# EAGLE board 13809-AT42QT1010_Capacitive_Touch_Breakout-Panel.v20 (EAGLE 7.7.0), part 1 of 3
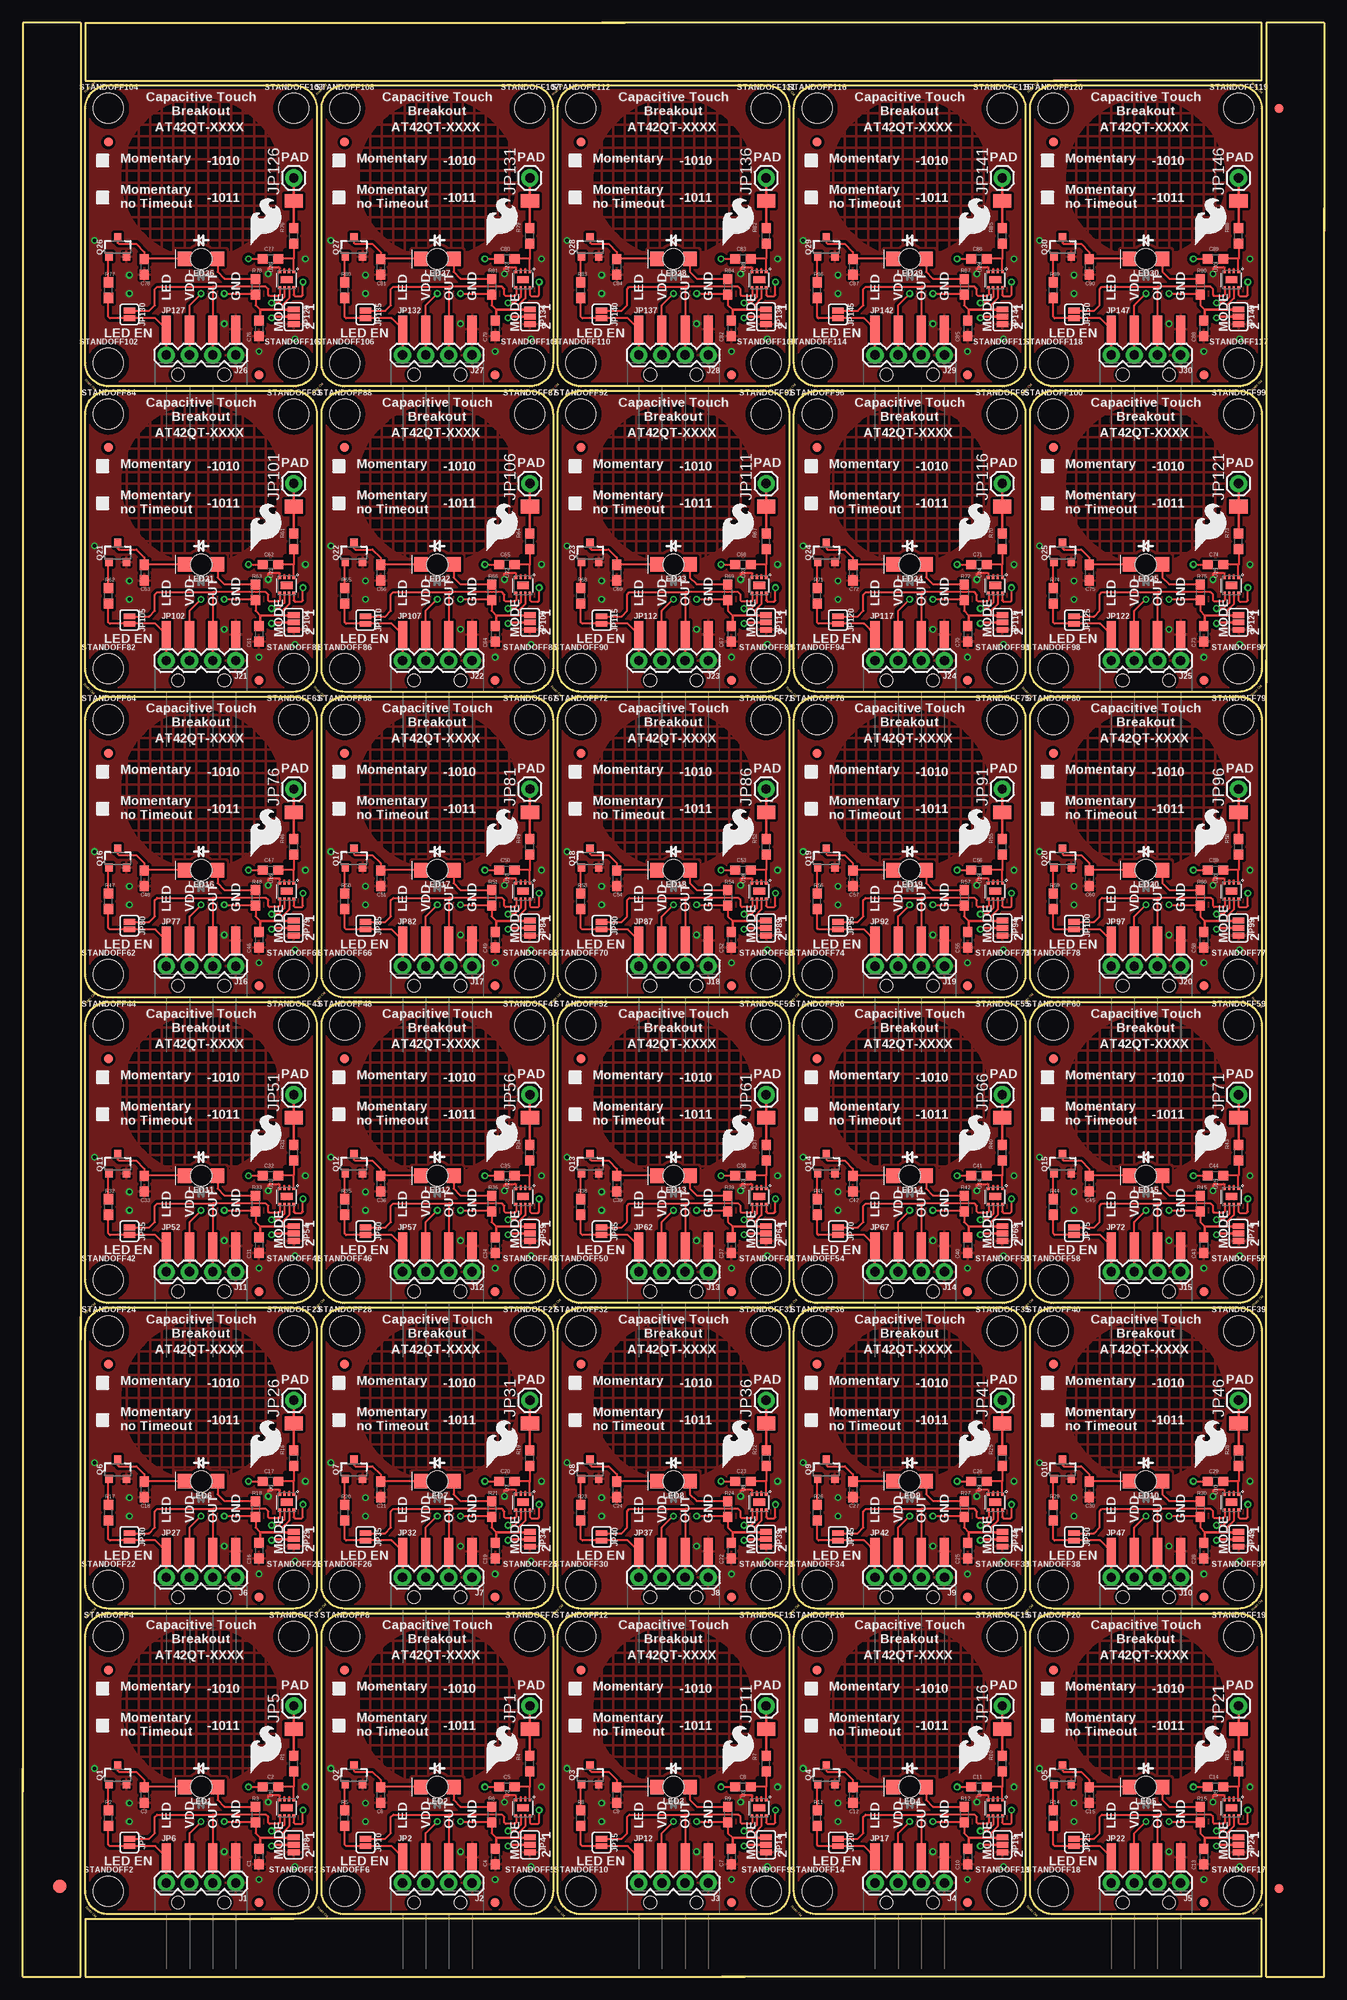
[diagram p0: board, top side]
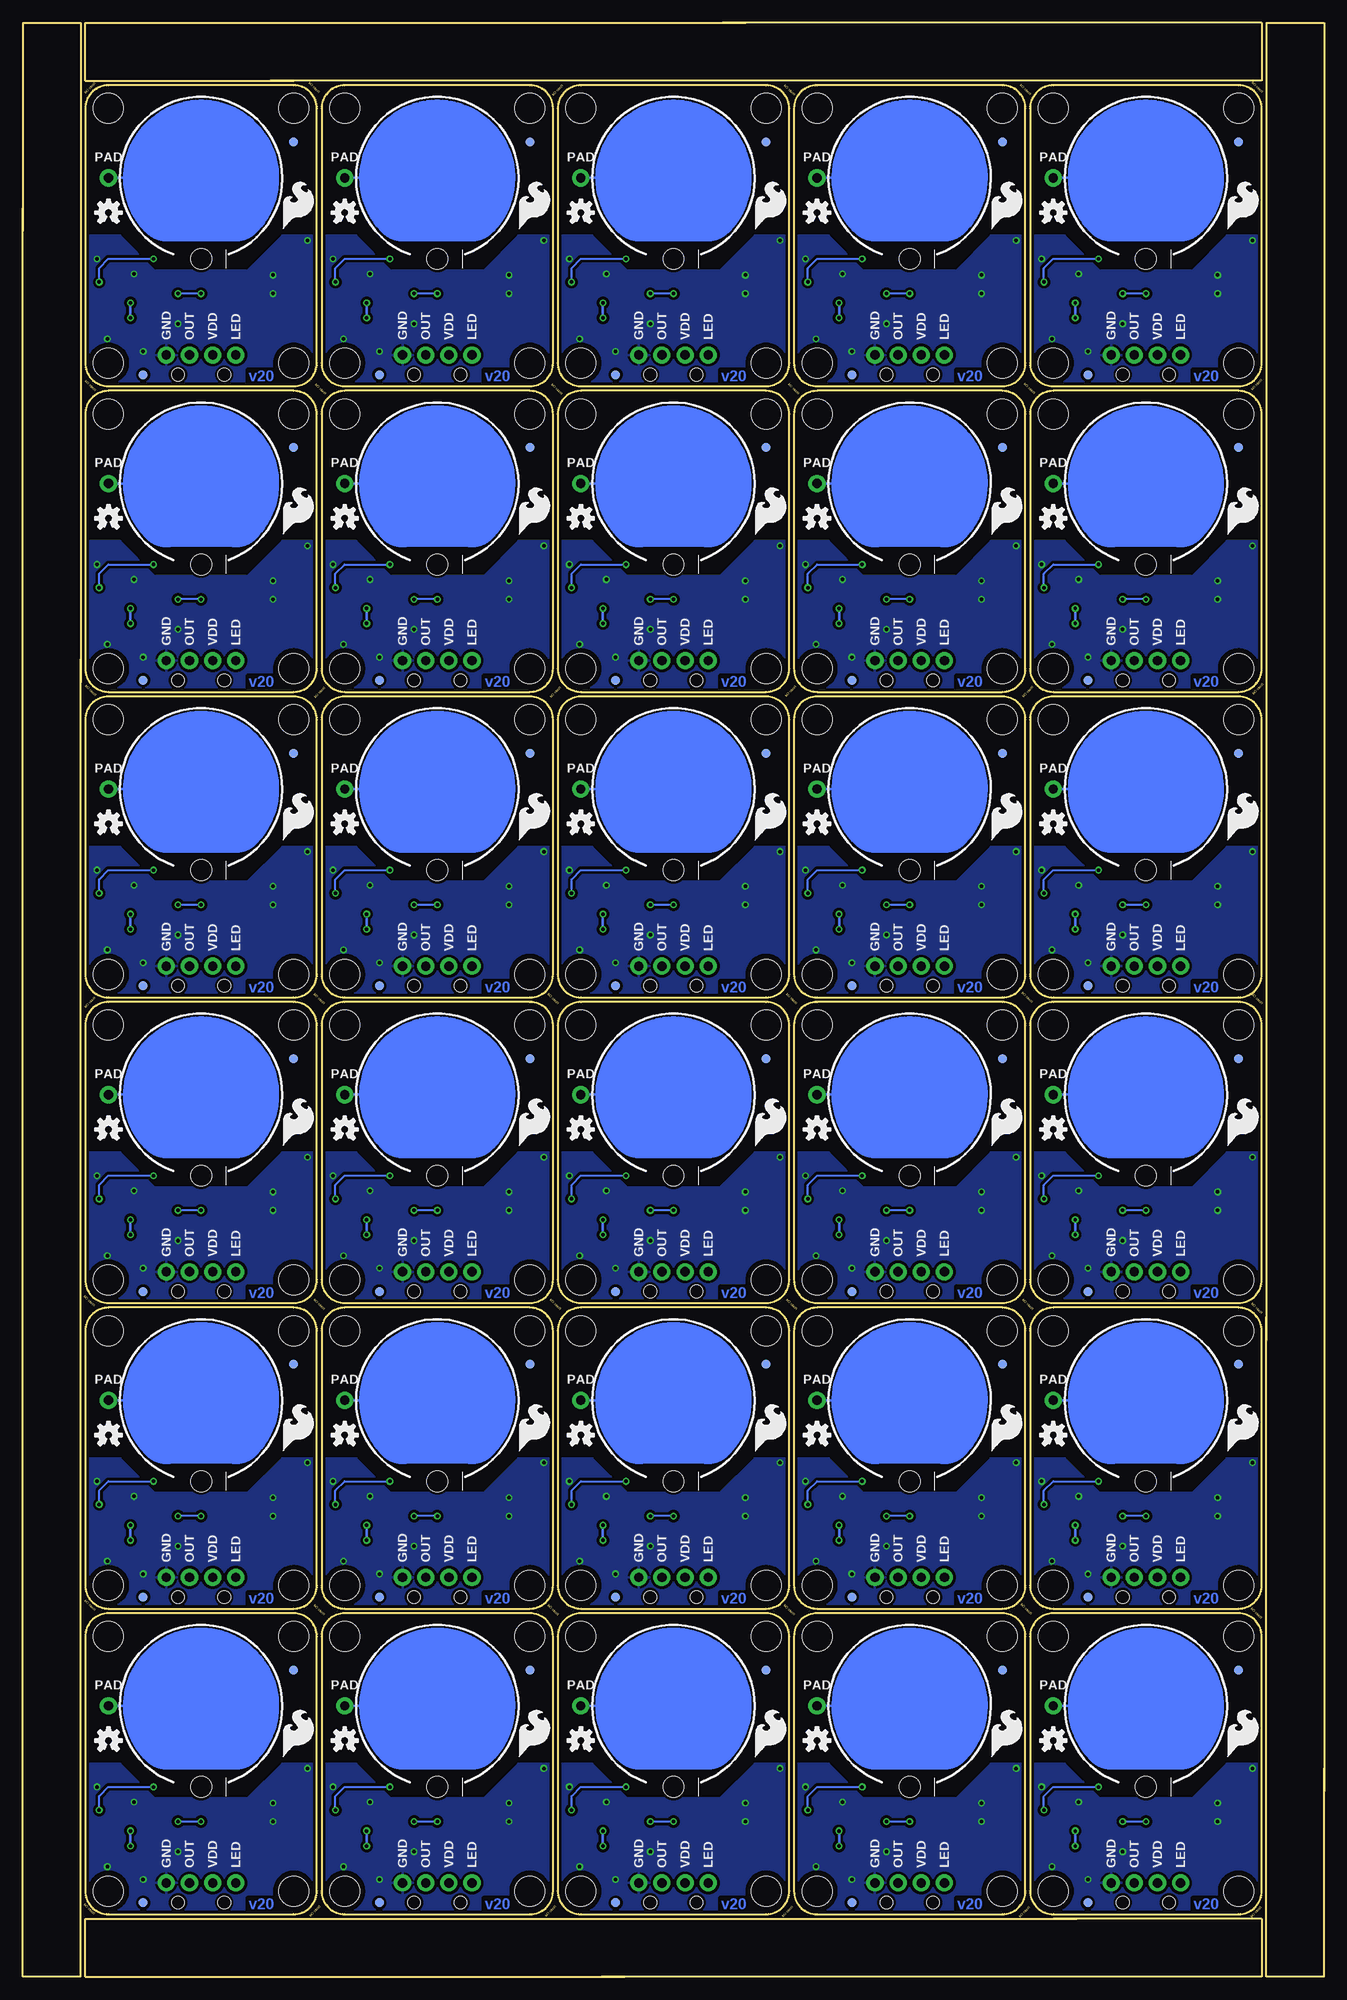
[diagram p1: board, bottom side, seen from below]

Size 142.75 x 214.38 mm. Coordinates in mm from the lower left corner, seen from the top.
Outline: 264 segments
Copper layers (1*16): Top 0.035mm / dielectric 1.5mm / Bottom 0.035mm
Design rules "SparkFun-2-layer-TIGHT": minimum track width 7mil, minimum drill 15mil, track to track 7mil, track to pad 7mil, pad to pad 7mil, via to via 7mil, smd to smd 7mil, copper to edge 7mil, drill to drill 7mil, minimum pad ring 7mil, minimum via ring 7mil, stop-mask expansion 4mil, vias tented up to drill 25mil, thermal gap 10mil
Net classes: 0 default: clearance 0.205 mm
tRestrict: area 6.9,6.9 to 9.4,9.4; area 29.7,6.9 to 32.3,9.4; area 6.9,37.3 to 9.4,39.9; area 29.7,37.3 to 32.3,39.9; area 21.8,9.1 to 22.4,9.7; area 16.8,9.1 to 17.3,9.7; area 18,7.4 to 21.1,8.9; area 19.3,9.1 to 19.8,9.7; area 26.3,15.9 to 26.7,16.4; area 29,19.9 to 29.3,20.4; area 28.8,21.2 to 29.2,21.7; area 32.8,6.9 to 35.3,9.4; 318 more areas

## Footprints (pad centres in the part's own frame; a part is rotated, then mirrored left to right if it is on the bottom)
0603 = smd 1.1 x 1: 1 -0.85,0; 2 0.85,0
FIDUCIAL-1.5X3 = smd 1.5 x 1.5: 1 0,0
FIDUCIAL-1X2 = smd 1 x 1: 1 0,0
1X04 = drill 1.016 pad 1.88: 1 0,0; 2 2.54,0; 3 5.08,0; 4 7.62,0
1X01 = drill 1.016 pad 1.88: 1 0,0
1X04_SMD_RA_MALE = smd 1 x 3: 1 -3.81,5; 2 -1.27,5; 3 1.27,5; 4 3.81,5 | hole 1.4: -2.54,0; 2.54,0
PAD-1.5X4.5 = smd 1.5 x 2: P$1 0,0
SMT-JUMPER_3_NO_SILK = smd 0.635 x 1.27: 1 -0.813,0; 2 0,0; 3 0.813,0
SMT-JUMPER_2_NO_SILK = smd 0.635 x 1.27: 1 -0.406,0; 2 0.406,0
LED-1206-BOTTOM = smd 1.5 x 1.6: A -1.8,0; C 1.8,0 | hole 2.3: 0,0
SOT23-3 = smd 0.8 x 0.9: 1 -0.95,-1; 2 0.95,-1; 3 0,1.1
STAND-OFF = hole 3.302: 0,0
UDFN/USON_8_PAD = smd 0.25 x 0.3: 1 -0.75,-0.852; 2 -0.25,-0.852; 3 0.25,-0.852; 4 0.75,-0.852; 5 0.75,0.852; 6 0.25,0.852; 7 -0.25,0.852; 8 -0.75,0.852 | smd 1.3 x 0.8: P$1 0,0

## Placement (x,y rotation side)
C1  0.1uF  [0603]  25.91,13.21 270 top
C2  10nF  [0603]  27.18,20.83 180 top
C3  10nF  [0603]  13.34,19.94 270 top
C4  0.1uF  [0603]  51.82,13.21 270 top
C5  10nF  [0603]  53.09,20.83 180 top
C6  10nF  [0603]  39.24,19.94 270 top
C7  0.1uF  [0603]  77.72,13.21 270 top
C8  10nF  [0603]  78.99,20.83 180 top
C9  10nF  [0603]  65.15,19.94 270 top
C10  0.1uF  [0603]  103.63,13.21 270 top
C11  10nF  [0603]  104.9,20.83 180 top
C12  10nF  [0603]  91.06,19.94 270 top
C13  0.1uF  [0603]  129.54,13.21 270 top
C14  10nF  [0603]  130.81,20.83 180 top
C15  10nF  [0603]  116.97,19.94 270 top
C16  0.1uF  [0603]  25.91,46.74 270 top
C17  10nF  [0603]  27.18,54.36 180 top
C18  10nF  [0603]  13.34,53.47 270 top
C19  0.1uF  [0603]  51.82,46.74 270 top
C20  10nF  [0603]  53.09,54.36 180 top
C21  10nF  [0603]  39.24,53.47 270 top
C22  0.1uF  [0603]  77.72,46.74 270 top
C23  10nF  [0603]  78.99,54.36 180 top
C24  10nF  [0603]  65.15,53.47 270 top
C25  0.1uF  [0603]  103.63,46.74 270 top
C26  10nF  [0603]  104.9,54.36 180 top
C27  10nF  [0603]  91.06,53.47 270 top
C28  0.1uF  [0603]  129.54,46.74 270 top
C29  10nF  [0603]  130.81,54.36 180 top
C30  10nF  [0603]  116.97,53.47 270 top
C31  0.1uF  [0603]  25.91,80.26 270 top
C32  10nF  [0603]  27.18,87.88 180 top
C33  10nF  [0603]  13.34,87 270 top
C34  0.1uF  [0603]  51.82,80.26 270 top
C35  10nF  [0603]  53.09,87.88 180 top
C36  10nF  [0603]  39.24,87 270 top
C37  0.1uF  [0603]  77.72,80.26 270 top
C38  10nF  [0603]  78.99,87.88 180 top
C39  10nF  [0603]  65.15,87 270 top
C40  0.1uF  [0603]  103.63,80.26 270 top
C41  10nF  [0603]  104.9,87.88 180 top
C42  10nF  [0603]  91.06,87 270 top
C43  0.1uF  [0603]  129.54,80.26 270 top
C44  10nF  [0603]  130.81,87.88 180 top
C45  10nF  [0603]  116.97,87 270 top
C46  0.1uF  [0603]  25.91,113.79 270 top
C47  10nF  [0603]  27.18,121.41 180 top
C48  10nF  [0603]  13.34,120.52 270 top
C49  0.1uF  [0603]  51.82,113.79 270 top
C50  10nF  [0603]  53.09,121.41 180 top
C51  10nF  [0603]  39.24,120.52 270 top
C52  0.1uF  [0603]  77.72,113.79 270 top
C53  10nF  [0603]  78.99,121.41 180 top
C54  10nF  [0603]  65.15,120.52 270 top
C55  0.1uF  [0603]  103.63,113.79 270 top
C56  10nF  [0603]  104.9,121.41 180 top
C57  10nF  [0603]  91.06,120.52 270 top
C58  0.1uF  [0603]  129.54,113.79 270 top
C59  10nF  [0603]  130.81,121.41 180 top
C60  10nF  [0603]  116.97,120.52 270 top
C61  0.1uF  [0603]  25.91,147.32 270 top
C62  10nF  [0603]  27.18,154.94 180 top
C63  10nF  [0603]  13.34,154.05 270 top
C64  0.1uF  [0603]  51.82,147.32 270 top
C65  10nF  [0603]  53.09,154.94 180 top
C66  10nF  [0603]  39.24,154.05 270 top
C67  0.1uF  [0603]  77.72,147.32 270 top
C68  10nF  [0603]  78.99,154.94 180 top
C69  10nF  [0603]  65.15,154.05 270 top
C70  0.1uF  [0603]  103.63,147.32 270 top
C71  10nF  [0603]  104.9,154.94 180 top
C72  10nF  [0603]  91.06,154.05 270 top
C73  0.1uF  [0603]  129.54,147.32 270 top
C74  10nF  [0603]  130.81,154.94 180 top
C75  10nF  [0603]  116.97,154.05 270 top
C76  0.1uF  [0603]  25.91,180.85 270 top
C77  10nF  [0603]  27.18,188.47 180 top
C78  10nF  [0603]  13.34,187.58 270 top
C79  0.1uF  [0603]  51.82,180.85 270 top
C80  10nF  [0603]  53.09,188.47 180 top
C81  10nF  [0603]  39.24,187.58 270 top
C82  0.1uF  [0603]  77.72,180.85 270 top
C83  10nF  [0603]  78.99,188.47 180 top
C84  10nF  [0603]  65.15,187.58 270 top
C85  0.1uF  [0603]  103.63,180.85 270 top
C86  10nF  [0603]  104.9,188.47 180 top
C87  10nF  [0603]  91.06,187.58 270 top
C88  0.1uF  [0603]  129.54,180.85 270 top
C89  10nF  [0603]  130.81,188.47 180 top
C90  10nF  [0603]  116.97,187.58 270 top
E$1  [FIDUCIAL-1.5X3]  4.06,9.91 0 top
E$7  [FIDUCIAL-1X2]  137.79,204.98 180 top
E$8  [FIDUCIAL-1X2]  137.79,9.65 0 top
FID1  FIDUCIAL1X2  [FIDUCIAL-1X2]  9.4,33.66 0 top
FID2  FIDUCIAL1X2  [FIDUCIAL-1X2]  25.91,8.13 0 top
FID3  FIDUCIAL1X2  [FIDUCIAL-1X2]  25.91,8.13 0 bottom
FID4  FIDUCIAL1X2  [FIDUCIAL-1X2]  9.4,33.66 0 bottom
FID5  FIDUCIAL1X2  [FIDUCIAL-1X2]  35.31,33.66 0 top
FID6  FIDUCIAL1X2  [FIDUCIAL-1X2]  51.82,8.13 0 top
FID7  FIDUCIAL1X2  [FIDUCIAL-1X2]  51.82,8.13 0 bottom
FID8  FIDUCIAL1X2  [FIDUCIAL-1X2]  35.31,33.66 0 bottom
FID9  FIDUCIAL1X2  [FIDUCIAL-1X2]  61.21,33.66 0 top
FID10  FIDUCIAL1X2  [FIDUCIAL-1X2]  77.72,8.13 0 top
FID11  FIDUCIAL1X2  [FIDUCIAL-1X2]  77.72,8.13 0 bottom
FID12  FIDUCIAL1X2  [FIDUCIAL-1X2]  61.21,33.66 0 bottom
FID13  FIDUCIAL1X2  [FIDUCIAL-1X2]  87.12,33.66 0 top
FID14  FIDUCIAL1X2  [FIDUCIAL-1X2]  103.63,8.13 0 top
FID15  FIDUCIAL1X2  [FIDUCIAL-1X2]  103.63,8.13 0 bottom
FID16  FIDUCIAL1X2  [FIDUCIAL-1X2]  87.12,33.66 0 bottom
FID17  FIDUCIAL1X2  [FIDUCIAL-1X2]  113.03,33.66 0 top
FID18  FIDUCIAL1X2  [FIDUCIAL-1X2]  129.54,8.13 0 top
FID19  FIDUCIAL1X2  [FIDUCIAL-1X2]  129.54,8.13 0 bottom
FID20  FIDUCIAL1X2  [FIDUCIAL-1X2]  113.03,33.66 0 bottom
FID21  FIDUCIAL1X2  [FIDUCIAL-1X2]  9.4,67.18 0 top
FID22  FIDUCIAL1X2  [FIDUCIAL-1X2]  25.91,41.66 0 top
FID23  FIDUCIAL1X2  [FIDUCIAL-1X2]  25.91,41.66 0 bottom
FID24  FIDUCIAL1X2  [FIDUCIAL-1X2]  9.4,67.18 0 bottom
FID25  FIDUCIAL1X2  [FIDUCIAL-1X2]  35.31,67.18 0 top
FID26  FIDUCIAL1X2  [FIDUCIAL-1X2]  51.82,41.66 0 top
FID27  FIDUCIAL1X2  [FIDUCIAL-1X2]  51.82,41.66 0 bottom
FID28  FIDUCIAL1X2  [FIDUCIAL-1X2]  35.31,67.18 0 bottom
FID29  FIDUCIAL1X2  [FIDUCIAL-1X2]  61.21,67.18 0 top
FID30  FIDUCIAL1X2  [FIDUCIAL-1X2]  77.72,41.66 0 top
FID31  FIDUCIAL1X2  [FIDUCIAL-1X2]  77.72,41.66 0 bottom
FID32  FIDUCIAL1X2  [FIDUCIAL-1X2]  61.21,67.18 0 bottom
FID33  FIDUCIAL1X2  [FIDUCIAL-1X2]  87.12,67.18 0 top
FID34  FIDUCIAL1X2  [FIDUCIAL-1X2]  103.63,41.66 0 top
FID35  FIDUCIAL1X2  [FIDUCIAL-1X2]  103.63,41.66 0 bottom
FID36  FIDUCIAL1X2  [FIDUCIAL-1X2]  87.12,67.18 0 bottom
FID37  FIDUCIAL1X2  [FIDUCIAL-1X2]  113.03,67.18 0 top
FID38  FIDUCIAL1X2  [FIDUCIAL-1X2]  129.54,41.66 0 top
FID39  FIDUCIAL1X2  [FIDUCIAL-1X2]  129.54,41.66 0 bottom
FID40  FIDUCIAL1X2  [FIDUCIAL-1X2]  113.03,67.18 0 bottom
FID41  FIDUCIAL1X2  [FIDUCIAL-1X2]  9.4,100.71 0 top
FID42  FIDUCIAL1X2  [FIDUCIAL-1X2]  25.91,75.18 0 top
FID43  FIDUCIAL1X2  [FIDUCIAL-1X2]  25.91,75.18 0 bottom
FID44  FIDUCIAL1X2  [FIDUCIAL-1X2]  9.4,100.71 0 bottom
FID45  FIDUCIAL1X2  [FIDUCIAL-1X2]  35.31,100.71 0 top
FID46  FIDUCIAL1X2  [FIDUCIAL-1X2]  51.82,75.18 0 top
FID47  FIDUCIAL1X2  [FIDUCIAL-1X2]  51.82,75.18 0 bottom
FID48  FIDUCIAL1X2  [FIDUCIAL-1X2]  35.31,100.71 0 bottom
FID49  FIDUCIAL1X2  [FIDUCIAL-1X2]  61.21,100.71 0 top
FID50  FIDUCIAL1X2  [FIDUCIAL-1X2]  77.72,75.18 0 top
FID51  FIDUCIAL1X2  [FIDUCIAL-1X2]  77.72,75.18 0 bottom
FID52  FIDUCIAL1X2  [FIDUCIAL-1X2]  61.21,100.71 0 bottom
FID53  FIDUCIAL1X2  [FIDUCIAL-1X2]  87.12,100.71 0 top
FID54  FIDUCIAL1X2  [FIDUCIAL-1X2]  103.63,75.18 0 top
FID55  FIDUCIAL1X2  [FIDUCIAL-1X2]  103.63,75.18 0 bottom
FID56  FIDUCIAL1X2  [FIDUCIAL-1X2]  87.12,100.71 0 bottom
FID57  FIDUCIAL1X2  [FIDUCIAL-1X2]  113.03,100.71 0 top
FID58  FIDUCIAL1X2  [FIDUCIAL-1X2]  129.54,75.18 0 top
FID59  FIDUCIAL1X2  [FIDUCIAL-1X2]  129.54,75.18 0 bottom
FID60  FIDUCIAL1X2  [FIDUCIAL-1X2]  113.03,100.71 0 bottom
FID61  FIDUCIAL1X2  [FIDUCIAL-1X2]  9.4,134.24 0 top
FID62  FIDUCIAL1X2  [FIDUCIAL-1X2]  25.91,108.71 0 top
FID63  FIDUCIAL1X2  [FIDUCIAL-1X2]  25.91,108.71 0 bottom
FID64  FIDUCIAL1X2  [FIDUCIAL-1X2]  9.4,134.24 0 bottom
FID65  FIDUCIAL1X2  [FIDUCIAL-1X2]  35.31,134.24 0 top
FID66  FIDUCIAL1X2  [FIDUCIAL-1X2]  51.82,108.71 0 top
FID67  FIDUCIAL1X2  [FIDUCIAL-1X2]  51.82,108.71 0 bottom
FID68  FIDUCIAL1X2  [FIDUCIAL-1X2]  35.31,134.24 0 bottom
FID69  FIDUCIAL1X2  [FIDUCIAL-1X2]  61.21,134.24 0 top
FID70  FIDUCIAL1X2  [FIDUCIAL-1X2]  77.72,108.71 0 top
FID71  FIDUCIAL1X2  [FIDUCIAL-1X2]  77.72,108.71 0 bottom
FID72  FIDUCIAL1X2  [FIDUCIAL-1X2]  61.21,134.24 0 bottom
FID73  FIDUCIAL1X2  [FIDUCIAL-1X2]  87.12,134.24 0 top
FID74  FIDUCIAL1X2  [FIDUCIAL-1X2]  103.63,108.71 0 top
FID75  FIDUCIAL1X2  [FIDUCIAL-1X2]  103.63,108.71 0 bottom
FID76  FIDUCIAL1X2  [FIDUCIAL-1X2]  87.12,134.24 0 bottom
FID77  FIDUCIAL1X2  [FIDUCIAL-1X2]  113.03,134.24 0 top
FID78  FIDUCIAL1X2  [FIDUCIAL-1X2]  129.54,108.71 0 top
FID79  FIDUCIAL1X2  [FIDUCIAL-1X2]  129.54,108.71 0 bottom
FID80  FIDUCIAL1X2  [FIDUCIAL-1X2]  113.03,134.24 0 bottom
FID81  FIDUCIAL1X2  [FIDUCIAL-1X2]  9.4,167.77 0 top
FID82  FIDUCIAL1X2  [FIDUCIAL-1X2]  25.91,142.24 0 top
FID83  FIDUCIAL1X2  [FIDUCIAL-1X2]  25.91,142.24 0 bottom
FID84  FIDUCIAL1X2  [FIDUCIAL-1X2]  9.4,167.77 0 bottom
FID85  FIDUCIAL1X2  [FIDUCIAL-1X2]  35.31,167.77 0 top
FID86  FIDUCIAL1X2  [FIDUCIAL-1X2]  51.82,142.24 0 top
FID87  FIDUCIAL1X2  [FIDUCIAL-1X2]  51.82,142.24 0 bottom
FID88  FIDUCIAL1X2  [FIDUCIAL-1X2]  35.31,167.77 0 bottom
FID89  FIDUCIAL1X2  [FIDUCIAL-1X2]  61.21,167.77 0 top
FID90  FIDUCIAL1X2  [FIDUCIAL-1X2]  77.72,142.24 0 top
FID91  FIDUCIAL1X2  [FIDUCIAL-1X2]  77.72,142.24 0 bottom
FID92  FIDUCIAL1X2  [FIDUCIAL-1X2]  61.21,167.77 0 bottom
FID93  FIDUCIAL1X2  [FIDUCIAL-1X2]  87.12,167.77 0 top
FID94  FIDUCIAL1X2  [FIDUCIAL-1X2]  103.63,142.24 0 top
FID95  FIDUCIAL1X2  [FIDUCIAL-1X2]  103.63,142.24 0 bottom
FID96  FIDUCIAL1X2  [FIDUCIAL-1X2]  87.12,167.77 0 bottom
FID97  FIDUCIAL1X2  [FIDUCIAL-1X2]  113.03,167.77 0 top
FID98  FIDUCIAL1X2  [FIDUCIAL-1X2]  129.54,142.24 0 top
FID99  FIDUCIAL1X2  [FIDUCIAL-1X2]  129.54,142.24 0 bottom
FID100  FIDUCIAL1X2  [FIDUCIAL-1X2]  113.03,167.77 0 bottom
FID101  FIDUCIAL1X2  [FIDUCIAL-1X2]  9.4,201.29 0 top
FID102  FIDUCIAL1X2  [FIDUCIAL-1X2]  25.91,175.77 0 top
FID103  FIDUCIAL1X2  [FIDUCIAL-1X2]  25.91,175.77 0 bottom
FID104  FIDUCIAL1X2  [FIDUCIAL-1X2]  9.4,201.29 0 bottom
FID105  FIDUCIAL1X2  [FIDUCIAL-1X2]  35.31,201.29 0 top
FID106  FIDUCIAL1X2  [FIDUCIAL-1X2]  51.82,175.77 0 top
FID107  FIDUCIAL1X2  [FIDUCIAL-1X2]  51.82,175.77 0 bottom
FID108  FIDUCIAL1X2  [FIDUCIAL-1X2]  35.31,201.29 0 bottom
FID109  FIDUCIAL1X2  [FIDUCIAL-1X2]  61.21,201.29 0 top
FID110  FIDUCIAL1X2  [FIDUCIAL-1X2]  77.72,175.77 0 top
FID111  FIDUCIAL1X2  [FIDUCIAL-1X2]  77.72,175.77 0 bottom
FID112  FIDUCIAL1X2  [FIDUCIAL-1X2]  61.21,201.29 0 bottom
FID113  FIDUCIAL1X2  [FIDUCIAL-1X2]  87.12,201.29 0 top
FID114  FIDUCIAL1X2  [FIDUCIAL-1X2]  103.63,175.77 0 top
FID115  FIDUCIAL1X2  [FIDUCIAL-1X2]  103.63,175.77 0 bottom
FID116  FIDUCIAL1X2  [FIDUCIAL-1X2]  87.12,201.29 0 bottom
FID117  FIDUCIAL1X2  [FIDUCIAL-1X2]  113.03,201.29 0 top
FID118  FIDUCIAL1X2  [FIDUCIAL-1X2]  129.54,175.77 0 top
FID119  FIDUCIAL1X2  [FIDUCIAL-1X2]  129.54,175.77 0 bottom
FID120  FIDUCIAL1X2  [FIDUCIAL-1X2]  113.03,201.29 0 bottom
J1  [1X04]  23.37,10.29 180 top
J2  [1X04]  49.28,10.29 180 top
J3  [1X04]  75.18,10.29 180 top
J4  [1X04]  101.09,10.29 180 top
J5  [1X04]  127,10.29 180 top
J6  [1X04]  23.37,43.81 180 top
J7  [1X04]  49.28,43.81 180 top
J8  [1X04]  75.18,43.81 180 top
J9  [1X04]  101.09,43.81 180 top
J10  [1X04]  127,43.81 180 top
J11  [1X04]  23.37,77.34 180 top
J12  [1X04]  49.28,77.34 180 top
J13  [1X04]  75.18,77.34 180 top
J14  [1X04]  101.09,77.34 180 top
J15  [1X04]  127,77.34 180 top
J16  [1X04]  23.37,110.87 180 top
J17  [1X04]  49.28,110.87 180 top
J18  [1X04]  75.18,110.87 180 top
J19  [1X04]  101.09,110.87 180 top
J20  [1X04]  127,110.87 180 top
J21  [1X04]  23.37,144.4 180 top
J22  [1X04]  49.28,144.4 180 top
J23  [1X04]  75.18,144.4 180 top
J24  [1X04]  101.09,144.4 180 top
J25  [1X04]  127,144.4 180 top
J26  [1X04]  23.37,177.93 180 top
J27  [1X04]  49.28,177.93 180 top
J28  [1X04]  75.18,177.93 180 top
J29  [1X04]  101.09,177.93 180 top
J30  [1X04]  127,177.93 180 top
JP1  [1X01]  55.63,29.72 0 top
JP2  SMD  [1X04_SMD_RA_MALE]  45.47,8.13 0 top
JP3  M01SMD-4.5X1.5  [PAD-1.5X4.5]  55.63,27.18 90 top
JP4  JUMPER-SMT_3_NO_SILK  [SMT-JUMPER_3_NO_SILK]  55.63,14.48 270 top
JP5  [1X01]  29.72,29.72 0 top
JP6  SMD  [1X04_SMD_RA_MALE]  19.56,8.13 0 top
JP7  JUMPER-SMT_2_NO_SILK  [SMT-JUMPER_2_NO_SILK]  11.68,14.73 270 top
JP8  JUMPER-SMT_3_NO_SILK  [SMT-JUMPER_3_NO_SILK]  29.72,14.48 270 top
JP9  M01SMD-4.5X1.5  [PAD-1.5X4.5]  29.72,27.18 90 top
JP10  JUMPER-SMT_2_NO_SILK  [SMT-JUMPER_2_NO_SILK]  37.59,14.73 270 top
JP11  [1X01]  81.53,29.72 0 top
JP12  SMD  [1X04_SMD_RA_MALE]  71.37,8.13 0 top
JP13  M01SMD-4.5X1.5  [PAD-1.5X4.5]  81.53,27.18 90 top
JP14  JUMPER-SMT_3_NO_SILK  [SMT-JUMPER_3_NO_SILK]  81.53,14.48 270 top
JP15  JUMPER-SMT_2_NO_SILK  [SMT-JUMPER_2_NO_SILK]  63.5,14.73 270 top
JP16  [1X01]  107.44,29.72 0 top
JP17  SMD  [1X04_SMD_RA_MALE]  97.28,8.13 0 top
JP18  M01SMD-4.5X1.5  [PAD-1.5X4.5]  107.44,27.18 90 top
JP19  JUMPER-SMT_3_NO_SILK  [SMT-JUMPER_3_NO_SILK]  107.44,14.48 270 top
JP20  JUMPER-SMT_2_NO_SILK  [SMT-JUMPER_2_NO_SILK]  89.41,14.73 270 top
JP21  [1X01]  133.35,29.72 0 top
JP22  SMD  [1X04_SMD_RA_MALE]  123.19,8.13 0 top
JP23  M01SMD-4.5X1.5  [PAD-1.5X4.5]  133.35,27.18 90 top
JP24  JUMPER-SMT_3_NO_SILK  [SMT-JUMPER_3_NO_SILK]  133.35,14.48 270 top
JP25  JUMPER-SMT_2_NO_SILK  [SMT-JUMPER_2_NO_SILK]  115.32,14.73 270 top
JP26  [1X01]  29.72,63.25 0 top
JP27  SMD  [1X04_SMD_RA_MALE]  19.56,41.66 0 top
JP28  M01SMD-4.5X1.5  [PAD-1.5X4.5]  29.72,60.71 90 top
JP29  JUMPER-SMT_3_NO_SILK  [SMT-JUMPER_3_NO_SILK]  29.72,48.01 270 top
JP30  JUMPER-SMT_2_NO_SILK  [SMT-JUMPER_2_NO_SILK]  11.68,48.26 270 top
JP31  [1X01]  55.63,63.25 0 top
JP32  SMD  [1X04_SMD_RA_MALE]  45.47,41.66 0 top
JP33  M01SMD-4.5X1.5  [PAD-1.5X4.5]  55.63,60.71 90 top
JP34  JUMPER-SMT_3_NO_SILK  [SMT-JUMPER_3_NO_SILK]  55.63,48.01 270 top
JP35  JUMPER-SMT_2_NO_SILK  [SMT-JUMPER_2_NO_SILK]  37.59,48.26 270 top
JP36  [1X01]  81.53,63.25 0 top
JP37  SMD  [1X04_SMD_RA_MALE]  71.37,41.66 0 top
JP38  M01SMD-4.5X1.5  [PAD-1.5X4.5]  81.53,60.71 90 top
JP39  JUMPER-SMT_3_NO_SILK  [SMT-JUMPER_3_NO_SILK]  81.53,48.01 270 top
JP40  JUMPER-SMT_2_NO_SILK  [SMT-JUMPER_2_NO_SILK]  63.5,48.26 270 top
JP41  [1X01]  107.44,63.25 0 top
JP42  SMD  [1X04_SMD_RA_MALE]  97.28,41.66 0 top
JP43  M01SMD-4.5X1.5  [PAD-1.5X4.5]  107.44,60.71 90 top
JP44  JUMPER-SMT_3_NO_SILK  [SMT-JUMPER_3_NO_SILK]  107.44,48.01 270 top
JP45  JUMPER-SMT_2_NO_SILK  [SMT-JUMPER_2_NO_SILK]  89.41,48.26 270 top
JP46  [1X01]  133.35,63.25 0 top
JP47  SMD  [1X04_SMD_RA_MALE]  123.19,41.66 0 top
JP48  M01SMD-4.5X1.5  [PAD-1.5X4.5]  133.35,60.71 90 top
JP49  JUMPER-SMT_3_NO_SILK  [SMT-JUMPER_3_NO_SILK]  133.35,48.01 270 top
JP50  JUMPER-SMT_2_NO_SILK  [SMT-JUMPER_2_NO_SILK]  115.32,48.26 270 top
JP51  [1X01]  29.72,96.77 0 top
JP52  SMD  [1X04_SMD_RA_MALE]  19.56,75.18 0 top
JP53  M01SMD-4.5X1.5  [PAD-1.5X4.5]  29.72,94.23 90 top
JP54  JUMPER-SMT_3_NO_SILK  [SMT-JUMPER_3_NO_SILK]  29.72,81.53 270 top
JP55  JUMPER-SMT_2_NO_SILK  [SMT-JUMPER_2_NO_SILK]  11.68,81.79 270 top
JP56  [1X01]  55.63,96.77 0 top
JP57  SMD  [1X04_SMD_RA_MALE]  45.47,75.18 0 top
JP58  M01SMD-4.5X1.5  [PAD-1.5X4.5]  55.63,94.23 90 top
JP59  JUMPER-SMT_3_NO_SILK  [SMT-JUMPER_3_NO_SILK]  55.63,81.53 270 top
JP60  JUMPER-SMT_2_NO_SILK  [SMT-JUMPER_2_NO_SILK]  37.59,81.79 270 top
JP61  [1X01]  81.53,96.77 0 top
JP62  SMD  [1X04_SMD_RA_MALE]  71.37,75.18 0 top
JP63  M01SMD-4.5X1.5  [PAD-1.5X4.5]  81.53,94.23 90 top
JP64  JUMPER-SMT_3_NO_SILK  [SMT-JUMPER_3_NO_SILK]  81.53,81.53 270 top
JP65  JUMPER-SMT_2_NO_SILK  [SMT-JUMPER_2_NO_SILK]  63.5,81.79 270 top
JP66  [1X01]  107.44,96.77 0 top
JP67  SMD  [1X04_SMD_RA_MALE]  97.28,75.18 0 top
JP68  M01SMD-4.5X1.5  [PAD-1.5X4.5]  107.44,94.23 90 top
JP69  JUMPER-SMT_3_NO_SILK  [SMT-JUMPER_3_NO_SILK]  107.44,81.53 270 top
JP70  JUMPER-SMT_2_NO_SILK  [SMT-JUMPER_2_NO_SILK]  89.41,81.79 270 top
JP71  [1X01]  133.35,96.77 0 top
JP72  SMD  [1X04_SMD_RA_MALE]  123.19,75.18 0 top
JP73  M01SMD-4.5X1.5  [PAD-1.5X4.5]  133.35,94.23 90 top
JP74  JUMPER-SMT_3_NO_SILK  [SMT-JUMPER_3_NO_SILK]  133.35,81.53 270 top
JP75  JUMPER-SMT_2_NO_SILK  [SMT-JUMPER_2_NO_SILK]  115.32,81.79 270 top
JP76  [1X01]  29.72,130.3 0 top
JP77  SMD  [1X04_SMD_RA_MALE]  19.56,108.71 0 top
JP78  M01SMD-4.5X1.5  [PAD-1.5X4.5]  29.72,127.76 90 top
JP79  JUMPER-SMT_3_NO_SILK  [SMT-JUMPER_3_NO_SILK]  29.72,115.06 270 top
JP80  JUMPER-SMT_2_NO_SILK  [SMT-JUMPER_2_NO_SILK]  11.68,115.32 270 top
JP81  [1X01]  55.63,130.3 0 top
JP82  SMD  [1X04_SMD_RA_MALE]  45.47,108.71 0 top
JP83  M01SMD-4.5X1.5  [PAD-1.5X4.5]  55.63,127.76 90 top
JP84  JUMPER-SMT_3_NO_SILK  [SMT-JUMPER_3_NO_SILK]  55.63,115.06 270 top
JP85  JUMPER-SMT_2_NO_SILK  [SMT-JUMPER_2_NO_SILK]  37.59,115.32 270 top
JP86  [1X01]  81.53,130.3 0 top
JP87  SMD  [1X04_SMD_RA_MALE]  71.37,108.71 0 top
JP88  M01SMD-4.5X1.5  [PAD-1.5X4.5]  81.53,127.76 90 top
JP89  JUMPER-SMT_3_NO_SILK  [SMT-JUMPER_3_NO_SILK]  81.53,115.06 270 top
JP90  JUMPER-SMT_2_NO_SILK  [SMT-JUMPER_2_NO_SILK]  63.5,115.32 270 top
JP91  [1X01]  107.44,130.3 0 top
JP92  SMD  [1X04_SMD_RA_MALE]  97.28,108.71 0 top
JP93  M01SMD-4.5X1.5  [PAD-1.5X4.5]  107.44,127.76 90 top
JP94  JUMPER-SMT_3_NO_SILK  [SMT-JUMPER_3_NO_SILK]  107.44,115.06 270 top
JP95  JUMPER-SMT_2_NO_SILK  [SMT-JUMPER_2_NO_SILK]  89.41,115.32 270 top
JP96  [1X01]  133.35,130.3 0 top
JP97  SMD  [1X04_SMD_RA_MALE]  123.19,108.71 0 top
JP98  M01SMD-4.5X1.5  [PAD-1.5X4.5]  133.35,127.76 90 top
JP99  JUMPER-SMT_3_NO_SILK  [SMT-JUMPER_3_NO_SILK]  133.35,115.06 270 top
JP100  JUMPER-SMT_2_NO_SILK  [SMT-JUMPER_2_NO_SILK]  115.32,115.32 270 top
JP101  [1X01]  29.72,163.83 0 top
JP102  SMD  [1X04_SMD_RA_MALE]  19.56,142.24 0 top
JP103  M01SMD-4.5X1.5  [PAD-1.5X4.5]  29.72,161.29 90 top
JP104  JUMPER-SMT_3_NO_SILK  [SMT-JUMPER_3_NO_SILK]  29.72,148.59 270 top
JP105  JUMPER-SMT_2_NO_SILK  [SMT-JUMPER_2_NO_SILK]  11.68,148.84 270 top
JP106  [1X01]  55.63,163.83 0 top
JP107  SMD  [1X04_SMD_RA_MALE]  45.47,142.24 0 top
JP108  M01SMD-4.5X1.5  [PAD-1.5X4.5]  55.63,161.29 90 top
JP109  JUMPER-SMT_3_NO_SILK  [SMT-JUMPER_3_NO_SILK]  55.63,148.59 270 top
JP110  JUMPER-SMT_2_NO_SILK  [SMT-JUMPER_2_NO_SILK]  37.59,148.84 270 top
JP111  [1X01]  81.53,163.83 0 top
JP112  SMD  [1X04_SMD_RA_MALE]  71.37,142.24 0 top
JP113  M01SMD-4.5X1.5  [PAD-1.5X4.5]  81.53,161.29 90 top
JP114  JUMPER-SMT_3_NO_SILK  [SMT-JUMPER_3_NO_SILK]  81.53,148.59 270 top
JP115  JUMPER-SMT_2_NO_SILK  [SMT-JUMPER_2_NO_SILK]  63.5,148.84 270 top
JP116  [1X01]  107.44,163.83 0 top
JP117  SMD  [1X04_SMD_RA_MALE]  97.28,142.24 0 top
JP118  M01SMD-4.5X1.5  [PAD-1.5X4.5]  107.44,161.29 90 top
JP119  JUMPER-SMT_3_NO_SILK  [SMT-JUMPER_3_NO_SILK]  107.44,148.59 270 top
JP120  JUMPER-SMT_2_NO_SILK  [SMT-JUMPER_2_NO_SILK]  89.41,148.84 270 top
JP121  [1X01]  133.35,163.83 0 top
JP122  SMD  [1X04_SMD_RA_MALE]  123.19,142.24 0 top
JP123  M01SMD-4.5X1.5  [PAD-1.5X4.5]  133.35,161.29 90 top
JP124  JUMPER-SMT_3_NO_SILK  [SMT-JUMPER_3_NO_SILK]  133.35,148.59 270 top
JP125  JUMPER-SMT_2_NO_SILK  [SMT-JUMPER_2_NO_SILK]  115.32,148.84 270 top
JP126  [1X01]  29.72,197.36 0 top
JP127  SMD  [1X04_SMD_RA_MALE]  19.56,175.77 0 top
JP128  M01SMD-4.5X1.5  [PAD-1.5X4.5]  29.72,194.82 90 top
JP129  JUMPER-SMT_3_NO_SILK  [SMT-JUMPER_3_NO_SILK]  29.72,182.12 270 top
JP130  JUMPER-SMT_2_NO_SILK  [SMT-JUMPER_2_NO_SILK]  11.68,182.37 270 top
JP131  [1X01]  55.63,197.36 0 top
JP132  SMD  [1X04_SMD_RA_MALE]  45.47,175.77 0 top
JP133  M01SMD-4.5X1.5  [PAD-1.5X4.5]  55.63,194.82 90 top
JP134  JUMPER-SMT_3_NO_SILK  [SMT-JUMPER_3_NO_SILK]  55.63,182.12 270 top
JP135  JUMPER-SMT_2_NO_SILK  [SMT-JUMPER_2_NO_SILK]  37.59,182.37 270 top
JP136  [1X01]  81.53,197.36 0 top
JP137  SMD  [1X04_SMD_RA_MALE]  71.37,175.77 0 top
JP138  M01SMD-4.5X1.5  [PAD-1.5X4.5]  81.53,194.82 90 top
JP139  JUMPER-SMT_3_NO_SILK  [SMT-JUMPER_3_NO_SILK]  81.53,182.12 270 top
JP140  JUMPER-SMT_2_NO_SILK  [SMT-JUMPER_2_NO_SILK]  63.5,182.37 270 top
JP141  [1X01]  107.44,197.36 0 top
JP142  SMD  [1X04_SMD_RA_MALE]  97.28,175.77 0 top
JP143  M01SMD-4.5X1.5  [PAD-1.5X4.5]  107.44,194.82 90 top
JP144  JUMPER-SMT_3_NO_SILK  [SMT-JUMPER_3_NO_SILK]  107.44,182.12 270 top
JP145  JUMPER-SMT_2_NO_SILK  [SMT-JUMPER_2_NO_SILK]  89.41,182.37 270 top
JP146  [1X01]  133.35,197.36 0 top
JP147  SMD  [1X04_SMD_RA_MALE]  123.19,175.77 0 top
JP148  M01SMD-4.5X1.5  [PAD-1.5X4.5]  133.35,194.82 90 top
JP149  JUMPER-SMT_3_NO_SILK  [SMT-JUMPER_3_NO_SILK]  133.35,182.12 270 top
JP150  JUMPER-SMT_2_NO_SILK  [SMT-JUMPER_2_NO_SILK]  115.32,182.37 270 top
LED1  Green  [LED-1206-BOTTOM]  19.56,20.83 180 top
LED2  Green  [LED-1206-BOTTOM]  45.47,20.83 180 top
LED3  Green  [LED-1206-BOTTOM]  71.37,20.83 180 top
LED4  Green  [LED-1206-BOTTOM]  97.28,20.83 180 top
LED5  Green  [LED-1206-BOTTOM]  123.19,20.83 180 top
LED6  Green  [LED-1206-BOTTOM]  19.56,54.36 180 top
LED7  Green  [LED-1206-BOTTOM]  45.47,54.36 180 top
LED8  Green  [LED-1206-BOTTOM]  71.37,54.36 180 top
LED9  Green  [LED-1206-BOTTOM]  97.28,54.36 180 top
LED10  Green  [LED-1206-BOTTOM]  123.19,54.36 180 top
LED11  Green  [LED-1206-BOTTOM]  19.56,87.88 180 top
LED12  Green  [LED-1206-BOTTOM]  45.47,87.88 180 top
LED13  Green  [LED-1206-BOTTOM]  71.37,87.88 180 top
LED14  Green  [LED-1206-BOTTOM]  97.28,87.88 180 top
LED15  Green  [LED-1206-BOTTOM]  123.19,87.88 180 top
LED16  Green  [LED-1206-BOTTOM]  19.56,121.41 180 top
LED17  Green  [LED-1206-BOTTOM]  45.47,121.41 180 top
LED18  Green  [LED-1206-BOTTOM]  71.37,121.41 180 top
LED19  Green  [LED-1206-BOTTOM]  97.28,121.41 180 top
LED20  Green  [LED-1206-BOTTOM]  123.19,121.41 180 top
LED21  Green  [LED-1206-BOTTOM]  19.56,154.94 180 top
LED22  Green  [LED-1206-BOTTOM]  45.47,154.94 180 top
LED23  Green  [LED-1206-BOTTOM]  71.37,154.94 180 top
LED24  Green  [LED-1206-BOTTOM]  97.28,154.94 180 top
LED25  Green  [LED-1206-BOTTOM]  123.19,154.94 180 top
LED26  Green  [LED-1206-BOTTOM]  19.56,188.47 180 top
LED27  Green  [LED-1206-BOTTOM]  45.47,188.47 180 top
LED28  Green  [LED-1206-BOTTOM]  71.37,188.47 180 top
LED29  Green  [LED-1206-BOTTOM]  97.28,188.47 180 top
LED30  Green  [LED-1206-BOTTOM]  123.19,188.47 180 top
LOGO1  SFE_LOGO_FLAME.2_INCH  [SFE_LOGO_FLAME_.2]  24.64,22.1 0 top
LOGO2  OSHW-LOGOS  [OSHW-LOGO-S]  29.72,25.91 0 bottom
LOGO3  OSHW-LOGOS  [OSHW-LOGO-S]  55.63,25.91 0 bottom
LOGO4  SFE_LOGO_FLAME.2_INCH  [SFE_LOGO_FLAME_.2]  10.92,23.88 0 bottom
LOGO5  SFE_LOGO_FLAME.2_INCH  [SFE_LOGO_FLAME_.2]  36.83,23.88 0 bottom
LOGO6  SFE_LOGO_FLAME.2_INCH  [SFE_LOGO_FLAME_.2]  50.55,22.1 0 top
LOGO7  OSHW-LOGOS  [OSHW-LOGO-S]  81.53,25.91 0 bottom
LOGO8  SFE_LOGO_FLAME.2_INCH  [SFE_LOGO_FLAME_.2]  62.74,23.88 0 bottom
LOGO9  SFE_LOGO_FLAME.2_INCH  [SFE_LOGO_FLAME_.2]  76.45,22.1 0 top
LOGO10  OSHW-LOGOS  [OSHW-LOGO-S]  107.44,25.91 0 bottom
LOGO11  SFE_LOGO_FLAME.2_INCH  [SFE_LOGO_FLAME_.2]  88.65,23.88 0 bottom
LOGO12  SFE_LOGO_FLAME.2_INCH  [SFE_LOGO_FLAME_.2]  102.36,22.1 0 top
LOGO13  OSHW-LOGOS  [OSHW-LOGO-S]  133.35,25.91 0 bottom
LOGO14  SFE_LOGO_FLAME.2_INCH  [SFE_LOGO_FLAME_.2]  114.55,23.88 0 bottom
LOGO15  SFE_LOGO_FLAME.2_INCH  [SFE_LOGO_FLAME_.2]  128.27,22.1 0 top
LOGO16  OSHW-LOGOS  [OSHW-LOGO-S]  29.72,59.44 0 bottom
LOGO17  SFE_LOGO_FLAME.2_INCH  [SFE_LOGO_FLAME_.2]  10.92,57.4 0 bottom
LOGO18  SFE_LOGO_FLAME.2_INCH  [SFE_LOGO_FLAME_.2]  24.64,55.63 0 top
LOGO19  OSHW-LOGOS  [OSHW-LOGO-S]  55.63,59.44 0 bottom
LOGO20  SFE_LOGO_FLAME.2_INCH  [SFE_LOGO_FLAME_.2]  36.83,57.4 0 bottom
LOGO21  SFE_LOGO_FLAME.2_INCH  [SFE_LOGO_FLAME_.2]  50.55,55.63 0 top
LOGO22  OSHW-LOGOS  [OSHW-LOGO-S]  81.53,59.44 0 bottom
LOGO23  SFE_LOGO_FLAME.2_INCH  [SFE_LOGO_FLAME_.2]  62.74,57.4 0 bottom
LOGO24  SFE_LOGO_FLAME.2_INCH  [SFE_LOGO_FLAME_.2]  76.45,55.63 0 top
LOGO25  OSHW-LOGOS  [OSHW-LOGO-S]  107.44,59.44 0 bottom
LOGO26  SFE_LOGO_FLAME.2_INCH  [SFE_LOGO_FLAME_.2]  88.65,57.4 0 bottom
LOGO27  SFE_LOGO_FLAME.2_INCH  [SFE_LOGO_FLAME_.2]  102.36,55.63 0 top
LOGO28  OSHW-LOGOS  [OSHW-LOGO-S]  133.35,59.44 0 bottom
LOGO29  SFE_LOGO_FLAME.2_INCH  [SFE_LOGO_FLAME_.2]  114.55,57.4 0 bottom
LOGO30  SFE_LOGO_FLAME.2_INCH  [SFE_LOGO_FLAME_.2]  128.27,55.63 0 top
LOGO31  OSHW-LOGOS  [OSHW-LOGO-S]  29.72,92.96 0 bottom
LOGO32  SFE_LOGO_FLAME.2_INCH  [SFE_LOGO_FLAME_.2]  10.92,90.93 0 bottom
LOGO33  SFE_LOGO_FLAME.2_INCH  [SFE_LOGO_FLAME_.2]  24.64,89.15 0 top
LOGO34  OSHW-LOGOS  [OSHW-LOGO-S]  55.63,92.96 0 bottom
LOGO35  SFE_LOGO_FLAME.2_INCH  [SFE_LOGO_FLAME_.2]  36.83,90.93 0 bottom
LOGO36  SFE_LOGO_FLAME.2_INCH  [SFE_LOGO_FLAME_.2]  50.55,89.15 0 top
LOGO37  OSHW-LOGOS  [OSHW-LOGO-S]  81.53,92.96 0 bottom
LOGO38  SFE_LOGO_FLAME.2_INCH  [SFE_LOGO_FLAME_.2]  62.74,90.93 0 bottom
LOGO39  SFE_LOGO_FLAME.2_INCH  [SFE_LOGO_FLAME_.2]  76.45,89.15 0 top
LOGO40  OSHW-LOGOS  [OSHW-LOGO-S]  107.44,92.96 0 bottom
LOGO41  SFE_LOGO_FLAME.2_INCH  [SFE_LOGO_FLAME_.2]  88.65,90.93 0 bottom
LOGO42  SFE_LOGO_FLAME.2_INCH  [SFE_LOGO_FLAME_.2]  102.36,89.15 0 top
LOGO43  OSHW-LOGOS  [OSHW-LOGO-S]  133.35,92.96 0 bottom
LOGO44  SFE_LOGO_FLAME.2_INCH  [SFE_LOGO_FLAME_.2]  114.55,90.93 0 bottom
LOGO45  SFE_LOGO_FLAME.2_INCH  [SFE_LOGO_FLAME_.2]  128.27,89.15 0 top
LOGO46  OSHW-LOGOS  [OSHW-LOGO-S]  29.72,126.49 0 bottom
LOGO47  SFE_LOGO_FLAME.2_INCH  [SFE_LOGO_FLAME_.2]  10.92,124.46 0 bottom
LOGO48  SFE_LOGO_FLAME.2_INCH  [SFE_LOGO_FLAME_.2]  24.64,122.68 0 top
LOGO49  OSHW-LOGOS  [OSHW-LOGO-S]  55.63,126.49 0 bottom
LOGO50  SFE_LOGO_FLAME.2_INCH  [SFE_LOGO_FLAME_.2]  36.83,124.46 0 bottom
LOGO51  SFE_LOGO_FLAME.2_INCH  [SFE_LOGO_FLAME_.2]  50.55,122.68 0 top
LOGO52  OSHW-LOGOS  [OSHW-LOGO-S]  81.53,126.49 0 bottom
LOGO53  SFE_LOGO_FLAME.2_INCH  [SFE_LOGO_FLAME_.2]  62.74,124.46 0 bottom
LOGO54  SFE_LOGO_FLAME.2_INCH  [SFE_LOGO_FLAME_.2]  76.45,122.68 0 top
LOGO55  OSHW-LOGOS  [OSHW-LOGO-S]  107.44,126.49 0 bottom
LOGO56  SFE_LOGO_FLAME.2_INCH  [SFE_LOGO_FLAME_.2]  88.65,124.46 0 bottom
LOGO57  SFE_LOGO_FLAME.2_INCH  [SFE_LOGO_FLAME_.2]  102.36,122.68 0 top
LOGO58  OSHW-LOGOS  [OSHW-LOGO-S]  133.35,126.49 0 bottom
LOGO59  SFE_LOGO_FLAME.2_INCH  [SFE_LOGO_FLAME_.2]  114.55,124.46 0 bottom
LOGO60  SFE_LOGO_FLAME.2_INCH  [SFE_LOGO_FLAME_.2]  128.27,122.68 0 top
LOGO61  OSHW-LOGOS  [OSHW-LOGO-S]  29.72,160.02 0 bottom
LOGO62  SFE_LOGO_FLAME.2_INCH  [SFE_LOGO_FLAME_.2]  10.92,157.99 0 bottom
LOGO63  SFE_LOGO_FLAME.2_INCH  [SFE_LOGO_FLAME_.2]  24.64,156.21 0 top
LOGO64  OSHW-LOGOS  [OSHW-LOGO-S]  55.63,160.02 0 bottom
LOGO65  SFE_LOGO_FLAME.2_INCH  [SFE_LOGO_FLAME_.2]  36.83,157.99 0 bottom
LOGO66  SFE_LOGO_FLAME.2_INCH  [SFE_LOGO_FLAME_.2]  50.55,156.21 0 top
LOGO67  OSHW-LOGOS  [OSHW-LOGO-S]  81.53,160.02 0 bottom
LOGO68  SFE_LOGO_FLAME.2_INCH  [SFE_LOGO_FLAME_.2]  62.74,157.99 0 bottom
LOGO69  SFE_LOGO_FLAME.2_INCH  [SFE_LOGO_FLAME_.2]  76.45,156.21 0 top
LOGO70  OSHW-LOGOS  [OSHW-LOGO-S]  107.44,160.02 0 bottom
LOGO71  SFE_LOGO_FLAME.2_INCH  [SFE_LOGO_FLAME_.2]  88.65,157.99 0 bottom
LOGO72  SFE_LOGO_FLAME.2_INCH  [SFE_LOGO_FLAME_.2]  102.36,156.21 0 top
LOGO73  OSHW-LOGOS  [OSHW-LOGO-S]  133.35,160.02 0 bottom
LOGO74  SFE_LOGO_FLAME.2_INCH  [SFE_LOGO_FLAME_.2]  114.55,157.99 0 bottom
LOGO75  SFE_LOGO_FLAME.2_INCH  [SFE_LOGO_FLAME_.2]  128.27,156.21 0 top
LOGO76  OSHW-LOGOS  [OSHW-LOGO-S]  29.72,193.55 0 bottom
LOGO77  SFE_LOGO_FLAME.2_INCH  [SFE_LOGO_FLAME_.2]  10.92,191.52 0 bottom
LOGO78  SFE_LOGO_FLAME.2_INCH  [SFE_LOGO_FLAME_.2]  24.64,189.74 0 top
LOGO79  OSHW-LOGOS  [OSHW-LOGO-S]  55.63,193.55 0 bottom
LOGO80  SFE_LOGO_FLAME.2_INCH  [SFE_LOGO_FLAME_.2]  36.83,191.52 0 bottom
LOGO81  SFE_LOGO_FLAME.2_INCH  [SFE_LOGO_FLAME_.2]  50.55,189.74 0 top
LOGO82  OSHW-LOGOS  [OSHW-LOGO-S]  81.53,193.55 0 bottom
LOGO83  SFE_LOGO_FLAME.2_INCH  [SFE_LOGO_FLAME_.2]  62.74,191.52 0 bottom
LOGO84  SFE_LOGO_FLAME.2_INCH  [SFE_LOGO_FLAME_.2]  76.45,189.74 0 top
LOGO85  OSHW-LOGOS  [OSHW-LOGO-S]  107.44,193.55 0 bottom
LOGO86  SFE_LOGO_FLAME.2_INCH  [SFE_LOGO_FLAME_.2]  88.65,191.52 0 bottom
LOGO87  SFE_LOGO_FLAME.2_INCH  [SFE_LOGO_FLAME_.2]  102.36,189.74 0 top
LOGO88  OSHW-LOGOS  [OSHW-LOGO-S]  133.35,193.55 0 bottom
LOGO89  SFE_LOGO_FLAME.2_INCH  [SFE_LOGO_FLAME_.2]  114.55,191.52 0 bottom
LOGO90  SFE_LOGO_FLAME.2_INCH  [SFE_LOGO_FLAME_.2]  128.27,189.74 0 top
Q1  600mA/40V  [SOT23-3]  10.41,22.1 0 top
Q2  600mA/40V  [SOT23-3]  36.32,22.1 0 top
Q3  600mA/40V  [SOT23-3]  62.23,22.1 0 top
Q4  600mA/40V  [SOT23-3]  88.14,22.1 0 top
Q5  600mA/40V  [SOT23-3]  114.05,22.1 0 top
Q6  600mA/40V  [SOT23-3]  10.41,55.63 0 top
Q7  600mA/40V  [SOT23-3]  36.32,55.63 0 top
Q8  600mA/40V  [SOT23-3]  62.23,55.63 0 top
Q9  600mA/40V  [SOT23-3]  88.14,55.63 0 top
Q10  600mA/40V  [SOT23-3]  114.05,55.63 0 top
Q11  600mA/40V  [SOT23-3]  10.41,89.15 0 top
Q12  600mA/40V  [SOT23-3]  36.32,89.15 0 top
Q13  600mA/40V  [SOT23-3]  62.23,89.15 0 top
Q14  600mA/40V  [SOT23-3]  88.14,89.15 0 top
Q15  600mA/40V  [SOT23-3]  114.05,89.15 0 top
Q16  600mA/40V  [SOT23-3]  10.41,122.68 0 top
Q17  600mA/40V  [SOT23-3]  36.32,122.68 0 top
Q18  600mA/40V  [SOT23-3]  62.23,122.68 0 top
Q19  600mA/40V  [SOT23-3]  88.14,122.68 0 top
Q20  600mA/40V  [SOT23-3]  114.05,122.68 0 top
Q21  600mA/40V  [SOT23-3]  10.41,156.21 0 top
Q22  600mA/40V  [SOT23-3]  36.32,156.21 0 top
Q23  600mA/40V  [SOT23-3]  62.23,156.21 0 top
Q24  600mA/40V  [SOT23-3]  88.14,156.21 0 top
Q25  600mA/40V  [SOT23-3]  114.05,156.21 0 top
Q26  600mA/40V  [SOT23-3]  10.41,189.74 0 top
Q27  600mA/40V  [SOT23-3]  36.32,189.74 0 top
Q28  600mA/40V  [SOT23-3]  62.23,189.74 0 top
Q29  600mA/40V  [SOT23-3]  88.14,189.74 0 top
Q30  600mA/40V  [SOT23-3]  114.05,189.74 0 top
R1  10k  [0603]  29.72,23.37 90 top
R2  2.2k  [0603]  9.4,17.4 90 top
R3  200  [0603]  25.53,17.78 270 top
R4  10k  [0603]  55.63,23.37 90 top
R5  2.2k  [0603]  35.31,17.4 90 top
R6  200  [0603]  51.44,17.78 270 top
R7  10k  [0603]  81.53,23.37 90 top
R8  2.2k  [0603]  61.21,17.4 90 top
R9  200  [0603]  77.34,17.78 270 top
R10  10k  [0603]  107.44,23.37 90 top
R11  2.2k  [0603]  87.12,17.4 90 top
R12  200  [0603]  103.25,17.78 270 top
R13  10k  [0603]  133.35,23.37 90 top
R14  2.2k  [0603]  113.03,17.4 90 top
R15  200  [0603]  129.16,17.78 270 top
R16  10k  [0603]  29.72,56.9 90 top
R17  2.2k  [0603]  9.4,50.93 90 top
R18  200  [0603]  25.53,51.31 270 top
R19  10k  [0603]  55.63,56.9 90 top
R20  2.2k  [0603]  35.31,50.93 90 top
R21  200  [0603]  51.44,51.31 270 top
R22  10k  [0603]  81.53,56.9 90 top
R23  2.2k  [0603]  61.21,50.93 90 top
R24  200  [0603]  77.34,51.31 270 top
R25  10k  [0603]  107.44,56.9 90 top
R26  2.2k  [0603]  87.12,50.93 90 top
R27  200  [0603]  103.25,51.31 270 top
R28  10k  [0603]  133.35,56.9 90 top
R29  2.2k  [0603]  113.03,50.93 90 top
R30  200  [0603]  129.16,51.31 270 top
R31  10k  [0603]  29.72,90.42 90 top
R32  2.2k  [0603]  9.4,84.45 90 top
R33  200  [0603]  25.53,84.84 270 top
R34  10k  [0603]  55.63,90.42 90 top
R35  2.2k  [0603]  35.31,84.45 90 top
R36  200  [0603]  51.44,84.84 270 top
R37  10k  [0603]  81.53,90.42 90 top
R38  2.2k  [0603]  61.21,84.45 90 top
R39  200  [0603]  77.34,84.84 270 top
R40  10k  [0603]  107.44,90.42 90 top
R41  2.2k  [0603]  87.12,84.45 90 top
R42  200  [0603]  103.25,84.84 270 top
R43  10k  [0603]  133.35,90.42 90 top
R44  2.2k  [0603]  113.03,84.45 90 top
R45  200  [0603]  129.16,84.84 270 top
R46  10k  [0603]  29.72,123.95 90 top
R47  2.2k  [0603]  9.4,117.98 90 top
R48  200  [0603]  25.53,118.36 270 top
R49  10k  [0603]  55.63,123.95 90 top
R50  2.2k  [0603]  35.31,117.98 90 top
R51  200  [0603]  51.44,118.36 270 top
R52  10k  [0603]  81.53,123.95 90 top
R53  2.2k  [0603]  61.21,117.98 90 top
R54  200  [0603]  77.34,118.36 270 top
R55  10k  [0603]  107.44,123.95 90 top
R56  2.2k  [0603]  87.12,117.98 90 top
R57  200  [0603]  103.25,118.36 270 top
R58  10k  [0603]  133.35,123.95 90 top
R59  2.2k  [0603]  113.03,117.98 90 top
R60  200  [0603]  129.16,118.36 270 top
R61  10k  [0603]  29.72,157.48 90 top
R62  2.2k  [0603]  9.4,151.51 90 top
R63  200  [0603]  25.53,151.89 270 top
R64  10k  [0603]  55.63,157.48 90 top
R65  2.2k  [0603]  35.31,151.51 90 top
R66  200  [0603]  51.44,151.89 270 top
R67  10k  [0603]  81.53,157.48 90 top
R68  2.2k  [0603]  61.21,151.51 90 top
R69  200  [0603]  77.34,151.89 270 top
R70  10k  [0603]  107.44,157.48 90 top
R71  2.2k  [0603]  87.12,151.51 90 top
R72  200  [0603]  103.25,151.89 270 top
R73  10k  [0603]  133.35,157.48 90 top
R74  2.2k  [0603]  113.03,151.51 90 top
R75  200  [0603]  129.16,151.89 270 top
R76  10k  [0603]  29.72,191.01 90 top
R77  2.2k  [0603]  9.4,185.04 90 top
R78  200  [0603]  25.53,185.42 270 top
R79  10k  [0603]  55.63,191.01 90 top
R80  2.2k  [0603]  35.31,185.04 90 top
R81  200  [0603]  51.44,185.42 270 top
R82  10k  [0603]  81.53,191.01 90 top
R83  2.2k  [0603]  61.21,185.04 90 top
R84  200  [0603]  77.34,185.42 270 top
R85  10k  [0603]  107.44,191.01 90 top
R86  2.2k  [0603]  87.12,185.04 90 top
R87  200  [0603]  103.25,185.42 270 top
R88  10k  [0603]  133.35,191.01 90 top
R89  2.2k  [0603]  113.03,185.04 90 top
R90  200  [0603]  129.16,185.42 270 top
STANDOFF1  STAND-OFF  [STAND-OFF]  29.72,9.4 0 top
STANDOFF2  STAND-OFF  [STAND-OFF]  9.4,9.4 0 top
STANDOFF3  STAND-OFF  [STAND-OFF]  29.72,37.34 0 top
STANDOFF4  STAND-OFF  [STAND-OFF]  9.4,37.34 0 top
STANDOFF5  STAND-OFF  [STAND-OFF]  55.63,9.4 0 top
STANDOFF6  STAND-OFF  [STAND-OFF]  35.31,9.4 0 top
STANDOFF7  STAND-OFF  [STAND-OFF]  55.63,37.34 0 top
STANDOFF8  STAND-OFF  [STAND-OFF]  35.31,37.34 0 top
STANDOFF9  STAND-OFF  [STAND-OFF]  81.53,9.4 0 top
STANDOFF10  STAND-OFF  [STAND-OFF]  61.21,9.4 0 top
STANDOFF11  STAND-OFF  [STAND-OFF]  81.53,37.34 0 top
STANDOFF12  STAND-OFF  [STAND-OFF]  61.21,37.34 0 top
STANDOFF13  STAND-OFF  [STAND-OFF]  107.44,9.4 0 top
STANDOFF14  STAND-OFF  [STAND-OFF]  87.12,9.4 0 top
STANDOFF15  STAND-OFF  [STAND-OFF]  107.44,37.34 0 top
STANDOFF16  STAND-OFF  [STAND-OFF]  87.12,37.34 0 top
STANDOFF17  STAND-OFF  [STAND-OFF]  133.35,9.4 0 top
STANDOFF18  STAND-OFF  [STAND-OFF]  113.03,9.4 0 top
STANDOFF19  STAND-OFF  [STAND-OFF]  133.35,37.34 0 top
STANDOFF20  STAND-OFF  [STAND-OFF]  113.03,37.34 0 top
STANDOFF21  STAND-OFF  [STAND-OFF]  29.72,42.93 0 top
STANDOFF22  STAND-OFF  [STAND-OFF]  9.4,42.93 0 top
STANDOFF23  STAND-OFF  [STAND-OFF]  29.72,70.87 0 top
STANDOFF24  STAND-OFF  [STAND-OFF]  9.4,70.87 0 top
STANDOFF25  STAND-OFF  [STAND-OFF]  55.63,42.93 0 top
STANDOFF26  STAND-OFF  [STAND-OFF]  35.31,42.93 0 top
STANDOFF27  STAND-OFF  [STAND-OFF]  55.63,70.87 0 top
STANDOFF28  STAND-OFF  [STAND-OFF]  35.31,70.87 0 top
STANDOFF29  STAND-OFF  [STAND-OFF]  81.53,42.93 0 top
STANDOFF30  STAND-OFF  [STAND-OFF]  61.21,42.93 0 top
STANDOFF31  STAND-OFF  [STAND-OFF]  81.53,70.87 0 top
STANDOFF32  STAND-OFF  [STAND-OFF]  61.21,70.87 0 top
STANDOFF33  STAND-OFF  [STAND-OFF]  107.44,42.93 0 top
STANDOFF34  STAND-OFF  [STAND-OFF]  87.12,42.93 0 top
STANDOFF35  STAND-OFF  [STAND-OFF]  107.44,70.87 0 top
STANDOFF36  STAND-OFF  [STAND-OFF]  87.12,70.87 0 top
STANDOFF37  STAND-OFF  [STAND-OFF]  133.35,42.93 0 top
STANDOFF38  STAND-OFF  [STAND-OFF]  113.03,42.93 0 top
STANDOFF39  STAND-OFF  [STAND-OFF]  133.35,70.87 0 top
STANDOFF40  STAND-OFF  [STAND-OFF]  113.03,70.87 0 top
STANDOFF41  STAND-OFF  [STAND-OFF]  29.72,76.45 0 top
STANDOFF42  STAND-OFF  [STAND-OFF]  9.4,76.45 0 top
STANDOFF43  STAND-OFF  [STAND-OFF]  29.72,104.39 0 top
STANDOFF44  STAND-OFF  [STAND-OFF]  9.4,104.39 0 top
STANDOFF45  STAND-OFF  [STAND-OFF]  55.63,76.45 0 top
STANDOFF46  STAND-OFF  [STAND-OFF]  35.31,76.45 0 top
STANDOFF47  STAND-OFF  [STAND-OFF]  55.63,104.39 0 top
STANDOFF48  STAND-OFF  [STAND-OFF]  35.31,104.39 0 top
STANDOFF49  STAND-OFF  [STAND-OFF]  81.53,76.45 0 top
STANDOFF50  STAND-OFF  [STAND-OFF]  61.21,76.45 0 top
STANDOFF51  STAND-OFF  [STAND-OFF]  81.53,104.39 0 top
STANDOFF52  STAND-OFF  [STAND-OFF]  61.21,104.39 0 top
STANDOFF53  STAND-OFF  [STAND-OFF]  107.44,76.45 0 top
STANDOFF54  STAND-OFF  [STAND-OFF]  87.12,76.45 0 top
STANDOFF55  STAND-OFF  [STAND-OFF]  107.44,104.39 0 top
STANDOFF56  STAND-OFF  [STAND-OFF]  87.12,104.39 0 top
STANDOFF57  STAND-OFF  [STAND-OFF]  133.35,76.45 0 top
STANDOFF58  STAND-OFF  [STAND-OFF]  113.03,76.45 0 top
STANDOFF59  STAND-OFF  [STAND-OFF]  133.35,104.39 0 top
STANDOFF60  STAND-OFF  [STAND-OFF]  113.03,104.39 0 top
STANDOFF61  STAND-OFF  [STAND-OFF]  29.72,109.98 0 top
STANDOFF62  STAND-OFF  [STAND-OFF]  9.4,109.98 0 top
STANDOFF63  STAND-OFF  [STAND-OFF]  29.72,137.92 0 top
STANDOFF64  STAND-OFF  [STAND-OFF]  9.4,137.92 0 top
STANDOFF65  STAND-OFF  [STAND-OFF]  55.63,109.98 0 top
STANDOFF66  STAND-OFF  [STAND-OFF]  35.31,109.98 0 top
STANDOFF67  STAND-OFF  [STAND-OFF]  55.63,137.92 0 top
STANDOFF68  STAND-OFF  [STAND-OFF]  35.31,137.92 0 top
STANDOFF69  STAND-OFF  [STAND-OFF]  81.53,109.98 0 top
STANDOFF70  STAND-OFF  [STAND-OFF]  61.21,109.98 0 top
STANDOFF71  STAND-OFF  [STAND-OFF]  81.53,137.92 0 top
STANDOFF72  STAND-OFF  [STAND-OFF]  61.21,137.92 0 top
STANDOFF73  STAND-OFF  [STAND-OFF]  107.44,109.98 0 top
STANDOFF74  STAND-OFF  [STAND-OFF]  87.12,109.98 0 top
STANDOFF75  STAND-OFF  [STAND-OFF]  107.44,137.92 0 top
STANDOFF76  STAND-OFF  [STAND-OFF]  87.12,137.92 0 top
STANDOFF77  STAND-OFF  [STAND-OFF]  133.35,109.98 0 top
STANDOFF78  STAND-OFF  [STAND-OFF]  113.03,109.98 0 top
STANDOFF79  STAND-OFF  [STAND-OFF]  133.35,137.92 0 top
STANDOFF80  STAND-OFF  [STAND-OFF]  113.03,137.92 0 top
STANDOFF81  STAND-OFF  [STAND-OFF]  29.72,143.51 0 top
STANDOFF82  STAND-OFF  [STAND-OFF]  9.4,143.51 0 top
STANDOFF83  STAND-OFF  [STAND-OFF]  29.72,171.45 0 top
STANDOFF84  STAND-OFF  [STAND-OFF]  9.4,171.45 0 top
STANDOFF85  STAND-OFF  [STAND-OFF]  55.63,143.51 0 top
STANDOFF86  STAND-OFF  [STAND-OFF]  35.31,143.51 0 top
STANDOFF87  STAND-OFF  [STAND-OFF]  55.63,171.45 0 top
STANDOFF88  STAND-OFF  [STAND-OFF]  35.31,171.45 0 top
STANDOFF89  STAND-OFF  [STAND-OFF]  81.53,143.51 0 top
STANDOFF90  STAND-OFF  [STAND-OFF]  61.21,143.51 0 top
STANDOFF91  STAND-OFF  [STAND-OFF]  81.53,171.45 0 top
STANDOFF92  STAND-OFF  [STAND-OFF]  61.21,171.45 0 top
STANDOFF93  STAND-OFF  [STAND-OFF]  107.44,143.51 0 top
STANDOFF94  STAND-OFF  [STAND-OFF]  87.12,143.51 0 top
STANDOFF95  STAND-OFF  [STAND-OFF]  107.44,171.45 0 top
STANDOFF96  STAND-OFF  [STAND-OFF]  87.12,171.45 0 top
STANDOFF97  STAND-OFF  [STAND-OFF]  133.35,143.51 0 top
STANDOFF98  STAND-OFF  [STAND-OFF]  113.03,143.51 0 top
STANDOFF99  STAND-OFF  [STAND-OFF]  133.35,171.45 0 top
STANDOFF100  STAND-OFF  [STAND-OFF]  113.03,171.45 0 top
STANDOFF101  STAND-OFF  [STAND-OFF]  29.72,177.04 0 top
STANDOFF102  STAND-OFF  [STAND-OFF]  9.4,177.04 0 top
STANDOFF103  STAND-OFF  [STAND-OFF]  29.72,204.98 0 top
STANDOFF104  STAND-OFF  [STAND-OFF]  9.4,204.98 0 top
STANDOFF105  STAND-OFF  [STAND-OFF]  55.63,177.04 0 top
STANDOFF106  STAND-OFF  [STAND-OFF]  35.31,177.04 0 top
STANDOFF107  STAND-OFF  [STAND-OFF]  55.63,204.98 0 top
STANDOFF108  STAND-OFF  [STAND-OFF]  35.31,204.98 0 top
STANDOFF109  STAND-OFF  [STAND-OFF]  81.53,177.04 0 top
STANDOFF110  STAND-OFF  [STAND-OFF]  61.21,177.04 0 top
STANDOFF111  STAND-OFF  [STAND-OFF]  81.53,204.98 0 top
STANDOFF112  STAND-OFF  [STAND-OFF]  61.21,204.98 0 top
STANDOFF113  STAND-OFF  [STAND-OFF]  107.44,177.04 0 top
STANDOFF114  STAND-OFF  [STAND-OFF]  87.12,177.04 0 top
STANDOFF115  STAND-OFF  [STAND-OFF]  107.44,204.98 0 top
STANDOFF116  STAND-OFF  [STAND-OFF]  87.12,204.98 0 top
STANDOFF117  STAND-OFF  [STAND-OFF]  133.35,177.04 0 top
STANDOFF118  STAND-OFF  [STAND-OFF]  113.03,177.04 0 top
STANDOFF119  STAND-OFF  [STAND-OFF]  133.35,204.98 0 top
STANDOFF120  STAND-OFF  [STAND-OFF]  113.03,204.98 0 top
U1  AT42QT1010 - UDFN  [UDFN/USON_8_PAD]  28.96,18.54 180 top
U2  AT42QT1010 - UDFN  [UDFN/USON_8_PAD]  54.86,18.54 180 top
U3  AT42QT1010 - UDFN  [UDFN/USON_8_PAD]  80.77,18.54 180 top
U4  AT42QT1010 - UDFN  [UDFN/USON_8_PAD]  106.68,18.54 180 top
U5  AT42QT1010 - UDFN  [UDFN/USON_8_PAD]  132.59,18.54 180 top
U6  AT42QT1010 - UDFN  [UDFN/USON_8_PAD]  28.96,52.07 180 top
U7  AT42QT1010 - UDFN  [UDFN/USON_8_PAD]  54.86,52.07 180 top
U8  AT42QT1010 - UDFN  [UDFN/USON_8_PAD]  80.77,52.07 180 top
U9  AT42QT1010 - UDFN  [UDFN/USON_8_PAD]  106.68,52.07 180 top
U10  AT42QT1010 - UDFN  [UDFN/USON_8_PAD]  132.59,52.07 180 top
U11  AT42QT1010 - UDFN  [UDFN/USON_8_PAD]  28.96,85.6 180 top
U12  AT42QT1010 - UDFN  [UDFN/USON_8_PAD]  54.86,85.6 180 top
U13  AT42QT1010 - UDFN  [UDFN/USON_8_PAD]  80.77,85.6 180 top
U14  AT42QT1010 - UDFN  [UDFN/USON_8_PAD]  106.68,85.6 180 top
U15  AT42QT1010 - UDFN  [UDFN/USON_8_PAD]  132.59,85.6 180 top
U16  AT42QT1010 - UDFN  [UDFN/USON_8_PAD]  28.96,119.13 180 top
U17  AT42QT1010 - UDFN  [UDFN/USON_8_PAD]  54.86,119.13 180 top
U18  AT42QT1010 - UDFN  [UDFN/USON_8_PAD]  80.77,119.13 180 top
U19  AT42QT1010 - UDFN  [UDFN/USON_8_PAD]  106.68,119.13 180 top
U20  AT42QT1010 - UDFN  [UDFN/USON_8_PAD]  132.59,119.13 180 top
U21  AT42QT1010 - UDFN  [UDFN/USON_8_PAD]  28.96,152.65 180 top
U22  AT42QT1010 - UDFN  [UDFN/USON_8_PAD]  54.86,152.65 180 top
U23  AT42QT1010 - UDFN  [UDFN/USON_8_PAD]  80.77,152.65 180 top
U24  AT42QT1010 - UDFN  [UDFN/USON_8_PAD]  106.68,152.65 180 top
U25  AT42QT1010 - UDFN  [UDFN/USON_8_PAD]  132.59,152.65 180 top
U26  AT42QT1010 - UDFN  [UDFN/USON_8_PAD]  28.96,186.18 180 top
U27  AT42QT1010 - UDFN  [UDFN/USON_8_PAD]  54.86,186.18 180 top
U28  AT42QT1010 - UDFN  [UDFN/USON_8_PAD]  80.77,186.18 180 top
U29  AT42QT1010 - UDFN  [UDFN/USON_8_PAD]  106.68,186.18 180 top
U30  AT42QT1010 - UDFN  [UDFN/USON_8_PAD]  132.59,186.18 180 top

## Library data of the parts
C1 C4 C7 C10 C13 C16 C19 C22 C25 C28 C31 C34 C37 C40 C43 C46 C49 C52 C55 C58 C61 C64 C67 C70 C73 C76 C79 C82 C85 C88 = SparkFun-Capacitors; PROD_ID: CAP-00810
C2 C3 C5 C6 C8 C9 C11 C12 C14 C15 C17 C18 C20 C21 C23 C24 C26 C27 C29 C30 C32 C33 C35 C36 C38 C39 C41 C42 C44 C45 C47 C48 C50 C51 C53 C54 C56 C57 C59 C60 C62 C63 C65 C66 C68 C69 C71 C72 C74 C75 C77 C78 C80 C81 C83 C84 C86 C87 C89 C90 = SparkFun-Capacitors; PROD_ID: CAP-00867
E$1 = SparkFun-Retired
E$7 E$8 FID1-FID120 LOGO1-LOGO90 = SparkFun-Aesthetics
J1-J30 = SparkFun-Connectors; PROD_ID: CONN-09696
JP1 JP3 JP5 JP9 JP11 JP13 JP16 JP18 JP21 JP23 JP26 JP28 JP31 JP33 JP36 JP38 JP41 JP43 JP46 JP48 JP51 JP53 JP56 JP58 JP61 JP63 JP66 JP68 JP71 JP73 JP76 JP78 JP81 JP83 JP86 JP88 JP91 JP93 JP96 JP98 JP101 JP103 JP106 JP108 JP111 JP113 JP116 JP118 JP121 JP123 JP126 JP128 JP131 JP133 JP136 JP138 JP141 JP143 JP146 JP148 = SparkFun-Connectors
JP2 JP6 JP12 JP17 JP22 JP27 JP32 JP37 JP42 JP47 JP52 JP57 JP62 JP67 JP72 JP77 JP82 JP87 JP92 JP97 JP102 JP107 JP112 JP117 JP122 JP127 JP132 JP137 JP142 JP147 = SparkFun-Connectors; PROD_ID: CONN-09140; SF_ID: PRT-12638
JP4 JP7 JP8 JP10 JP14 JP15 JP19 JP20 JP24 JP25 JP29 JP30 JP34 JP35 JP39 JP40 JP44 JP45 JP49 JP50 JP54 JP55 JP59 JP60 JP64 JP65 JP69 JP70 JP74 JP75 JP79 JP80 JP84 JP85 JP89 JP90 JP94 JP95 JP99 JP100 JP104 JP105 JP109 JP110 JP114 JP115 JP119 JP120 JP124 JP125 JP129 JP130 JP134 JP135 JP139 JP140 JP144 JP145 JP149 JP150 = SparkFun-Jumpers
LED1-LED30 = SparkFun-LED; PROD_ID: DIO-11076
Q1-Q30 = SparkFun-DiscreteSemi; PROD_ID: TRANS-08049
R1 R4 R7 R10 R13 R16 R19 R22 R25 R28 R31 R34 R37 R40 R43 R46 R49 R52 R55 R58 R61 R64 R67 R70 R73 R76 R79 R82 R85 R88 = SparkFun-Resistors; PROD_ID: RES-00824
R2 R5 R8 R11 R14 R17 R20 R23 R26 R29 R32 R35 R38 R41 R44 R47 R50 R53 R56 R59 R62 R65 R68 R71 R74 R77 R80 R83 R86 R89 = SparkFun-Resistors; PROD_ID: RES-08272
R3 R6 R9 R12 R15 R18 R21 R24 R27 R30 R33 R36 R39 R42 R45 R48 R51 R54 R57 R60 R63 R66 R69 R72 R75 R78 R81 R84 R87 R90 = SparkFun-Resistors; PROD_ID: RES-08220
STANDOFF1-STANDOFF120 = SparkFun-Hardware
U1-U30 = local_parts; PROD_ID: IC-13773